# Altium PCB Shield_MCXC444 - PCB.PcbDoc (part 2 of 3)
Units mm, origin at the board's own origin, x right, y up, seen from the top; angles counter-clockwise.
Board outline 100 x 55 mm, 2 copper layers (Top Layer, Bottom Layer); 120 components, 83 nets, 361 pads, 693 vias.
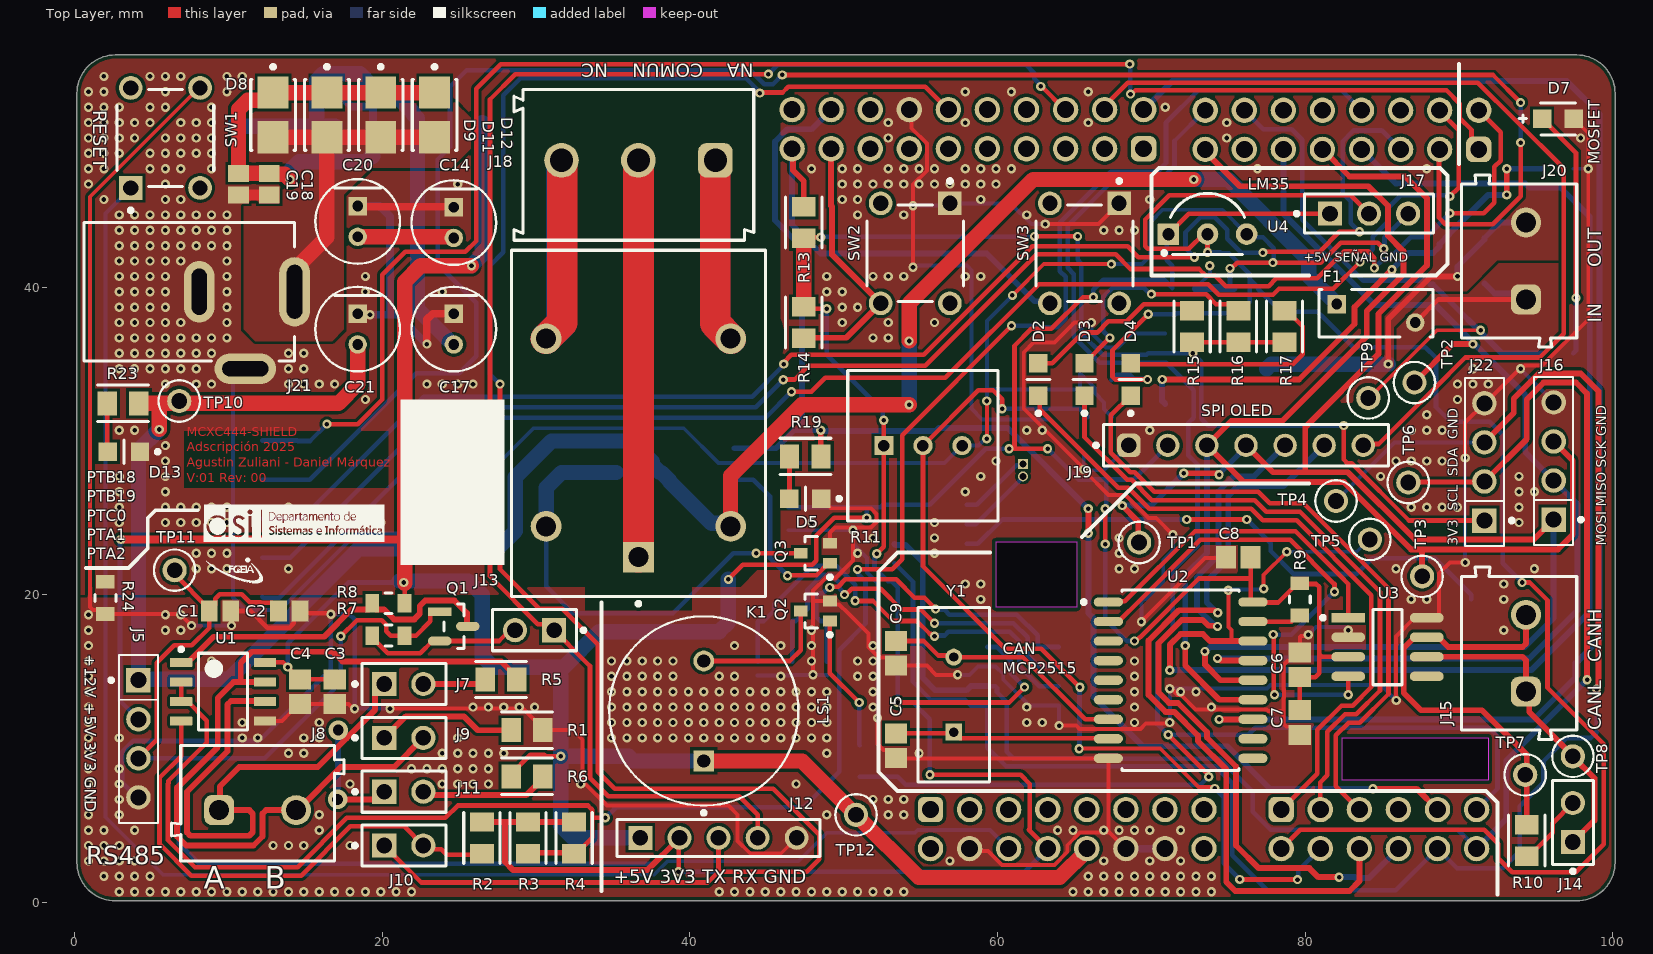
[diagram p0: Top Layer view]

## Via types
v1: diameter 0.6, hole 0.3, Top Layer to Bottom Layer, tented both sides, 543 vias
v2: diameter 0.6, hole 0.3, Top Layer to Bottom Layer, 148 vias
v3: diameter 1.27, hole 0.711, Top Layer to Bottom Layer, 2 vias

## Nets (pads, with @x,y where several pads share a name; then routed paths per layer and width w, separated by ;. In a path a pad name is that pad's centre, name@x,y a point inside that pad or via, vN(x,y) a via of type N, cw(c..) or ccw(c..) an arc to the next point about the centre after c; other vN are vias at no path point) (continued)
+3.3V: (continued)
  Top Layer w0.3: J5.3@4.15,9.37 5.349,10.569 5.349,15.595 6.474,16.721 7.625,16.721 8.75,17.846 C1.1@8.75,18.95 ; TP11.1@6.5,21.6 6.5,21.325 8.75,19.075 C1.1@8.75,18.95 ; C2.1@13.25,18.95 13.25,19.075 12.85,19.475 12.136,19.475 12.107,19.504 11.392,19.504 10.867,20.029 9.433,20.029 9.15,19.746 9.15,19.35 C1.1@8.75,18.95 ; v2(17.3,17.3) 18.354,18.354 19.967,18.354 20.259,18.063 20.259,17.641 20.55,17.35 R7.2@21.45,17.35 22.19,17.35 23.128,18.288 23.128,18.761 23.267,18.9 Q1.1@23.74,18.9 ; v2(39.25,2) 39.285,2.035 39.285,4.165 J12.2@39.32,4.2 ; R14.2@47.4,38.725 47.525,38.6 v2(48.9,38.6) ; R13.2@47.4,43.175 47.475,43.25 v2(48.5,43.25) ; v2(52.146,22.666) 52.61,23.13 R11.1@52.61,29.7 52.6,29.71 v2(52.6,31.35) ; v2(53.5,13) 60.75,13 v2(61.75,14) ; v2(55.6,8.3) 61.5,8.3 62.1,7.7 62.1,4.798 62.031,4.729 J3.8@63.26,3.5 ; v2(62.4,43.3) v2(65.2,43.3) ; v2(72.7,35.7) 72.7,36.375 R15.2@72.65,36.425 R16.2@75.65,36.425 R17.2@78.65,36.425 ; v2(82.5,31) 82.5,28.8 82.741,28.559 83.019,28.559 86.748,24.83 J22.1@91.65,24.83
  Top Layer w0.381: R2.2@26.472,5.225 27.972,5.225 ; R4.2@32.472,5.225 R3.2@29.472,5.225 27.972,5.225 ; J12.2@39.285,4.165 37.222,2.102 28.51,2.102 27.972,2.64 27.972,5.225
  Top Layer w1: R14.2@47.4,38.725 R13.2@47.4,43.175
  Bottom Layer w0.3: J5.3@4.15,9.37 6.76,9.37 ; v2(17.3,17.3) 17.3,14.3 12.37,9.37 6.76,9.37 ; v2(39.25,2) 61.76,2 J3.8@63.26,3.5 ; J12.2@39.32,4.2 37.631,2.511 8.089,2.511 6.76,3.84 6.76,9.37 ; v2(48.5,43.25) 48.525,43.275 62.375,43.275 v2(62.4,43.3) ; v2(48.9,38.6) 48.9,35.6 52.543,31.957 52.543,31.407 v2(52.6,31.35) ; v2(52.146,22.666) 52.146,22.585 52,22.439 52,21.776 52.876,20.9 53.1,20.9 53.5,20.5 v2(53.5,13) 54.5,13 55.6,11.9 v2(55.6,8.3) ; U7.8@59.332,16.605 59.95,16.605 60.846,15.709 60.846,14.904 v2(61.75,14) ; v2(65.2,43.3) 65.2,41.775 65.45,41.525 65.45,36.989 66.843,35.596 69.679,35.596 69.783,35.7 v2(72.7,35.7) 73.247,35.153 73.247,31.452 73.7,31 v2(82.5,31)
+5V: C3.2 C4.2 C6.2 C7.2 C8.2 C12.2 C22.1 C23.1 D10.2 J3.10 J5.2 J12.1 J17.1 J19.2 LS1.1 R6.1 R8.2 R9.2 TP12.1 U1.8 U2.18 U3.3 U4.1 U6.8 | length 284.2
  Top Layer w0.3: U1.8@12.375,15.605 13.545,15.605 v2(13.848,15.302) 14.075,15.075 14.075,15 14.575,14.5 C4.2@14.65,14.5 C3.2@16.9,14.5 ; 21.375,23.6 21.45,23.525 ; v2(21.4,20.8) 21.45,20.75 R8.2@21.45,19.45 ; R6.1@28.375,8.2 28.375,8.35 29.624,9.6 30.521,9.6 30.621,9.5 v2(31.6,9.5) ; v2(42.5,21) 43.446,21.946 47.946,21.946 48.214,22.214 48.214,23.836 49.379,25 v2(51.5,25) ; v2(60.75,29.5) 61.1,29.5 ; v2(63.25,29.5) 61.1,29.5 ; v2(66.23,39.356) 65.556,39.356 63.5,37.3 62.2,37.3 61.1,36.2 61.1,29.5 ; v2(67,23.3) v2(67,25.6) ; v2(68.9,17) 68.981,17 69.231,17.25 69.269,17.25 73.079,21.059 76.45,21.059 ; U4.1@71.11,43.45 72.44,44.78 J17.1@81.61,44.78 ; C8.2@76.45,22.45 76.45,21.059 ; C7.2@79.65,12.5 C6.2@79.65,14.65 80.65,14.65 80.9,14.9 80.9,16.146 ; U3.3@82.798,15.97 81.076,15.97 80.9,16.146 ; 76.45,21.059 76.45,19.669 76.589,19.53 U2.18@76.6,19.53 76.63,19.5 78.25,19.5 79.5,20.75 R9.2@79.65,20.75 79.7,20.7 80.724,20.7 80.9,20.524 80.9,16.146
  Top Layer w0.5: v2(3,23.6) 21.375,23.6
  Top Layer w1: v2@21.45,20.75 21.45,23.525 21.45,40.35 22.5,41.4 v2(25.8,41.4) ; LS1.1@40.9,9.2 47.3,9.2 TP12.1@50.8,5.7 54.879,1.621 64.038,1.621 65.8,3.383 J3.10@65.8,3.5
  Bottom Layer w0.3: v2(3,23.6) 2.951,23.551 2.951,13.109 J5.2@4.15,11.91 ; v2(13.848,15.302) 13.848,16.848 17.3,20.3 17.8,20.8 v2(21.4,20.8) ; C23.1@46.4,25.7 C22.1@49.4,25.7 51.5,25.7 ; v2(51.5,25) 51.5,25.7 ; v2(60.75,29.5) 59.242,29.5 55.597,25.855 U6.8@53.3,25.855 52.569,25.855 52.414,25.7 51.5,25.7 ; v2(63.25,29.5) 65.25,27.5 67.053,27.5 ; v2(66.23,39.356) 66.23,39.83 66.87,40.47 70.85,40.47 71.35,39.97 C12.2@71.35,39.95 ; v2(67,23.3) 67,18.4 68.4,17 v2(68.9,17) ; v2(67,25.6) 67.053,25.653 67.053,27.5 ; J19.2@71.07,29.715 69.918,28.563 68.855,27.5 67.053,27.5 ; U4.1@71.11,43.45 71,43.34 71,41.75 71.35,41.4 C12.2@71.35,40.025
  Bottom Layer w1: 21.1,20.9 25.6,20.9 26.5,20 26.5,16 27.2,15.3 31.014,15.3 ; v2(25.8,41.4) 26.51,42.11 D10.2@26.51,50.7 ; J12.1@36.78,4.2 32.4,4.2 31.6,5 v2(31.6,9.5) ; LS1.1@40.9,9.2 36.313,9.2 36.012,9.5 v2(31.6,9.5) ; v2(42.5,21) 42.5,18.2 41.9,17.6 34.1,17.6 31.8,15.3 31.014,15.3 ; 31.014,15.3 31.6,14.714 v2(31.6,9.5)
+9V: J3.16
+12V: C14.2 C15.1 C18.1 C19.1 C20.2 C21.2 D1.1 D8.1 D9.1 D11.1 D12.1 F1.1 J5.1 K1.2 R23.2 TP10.1 U5.3 | length 178
  Top Layer w0.3: R23.2@4.175,32.45 R23.2@4.653,31.972
  Top Layer w1: R23.2@4.175,32.45 5.5,32.45 ; v2(5.5,30.75) 5.5,32.45 ; v2(14,47) 13.65,47.35 12.7,47.35 C18.1@12.65,47.4 C19.1@10.65,47.4 10.65,51.557 11.236,52.143 12.4,52.143 12.9,52.643 D8.1@12.9,52.65 D9.1@16.4,52.65 D11.1@19.9,52.65 D12.1@23.4,52.65 ; C21.2@18.4,36.275 18.4,33.7 17.15,32.45 5.5,32.45 ; C20.2@18.4,43.275 24.521,43.275 24.596,43.2 C14.2@24.65,43.2 ; K1.2@42.65,24.45 42.639,24.461 42.639,27.739 47.25,32.35 v2(54.25,32.35) ; v2(54.25,36.504) 54.25,38.936 62.314,47 v2(72.75,47)
  Bottom Layer w1: v2(5.5,30.75) 4.15,29.4 J5.1@4.15,14.45 4.2,14.5 10,14.5 18.5,23 27.5,23 28.65,24.15 28.65,27.65 31,30 36.2,30 37.55,28.65 37.55,28.45 38.05,27.95 38.15,27.95 38.65,27.45 38.65,27.4 41.409,24.641 42.459,24.641 K1.2@42.65,24.45 ; v2(14,47) 14,47.574 14.586,48.16 U5.3@16.945,48.16 18.935,48.16 19.275,48.5 C15.1@19.4,48.5 ; v2(54.25,32.35) v2(54.25,36.504) ; v2(72.75,47) 75,47 80.225,41.775 80.225,40.725 F1.1@82.05,38.9
\CAN_CS: J1.7 TP5.1 U2.16 | length 93.4
  Top Layer w0.254: v2(75,20.3) 75,17.9 75.2,17.7 75.2,16.995 75.205,16.99 ; v2(77.3,20.4) 77.3,21.3 v2(78.802,22.802) ; TP5.1@83.994,23.6 TP5.1@84.2,23.6
  Top Layer w0.381: v2(71.2,15.1) 71.2,16.753 71.892,17.444 73.356,17.444 73.81,16.99 75.205,16.99 U2.16@76.6,16.99
  Bottom Layer w0.254: v2(75,20.3) 75.05,20.35 77.25,20.35 v2(77.3,20.4) ; v2(78.802,22.802) 83.349,22.802 84.147,23.6 TP5.1@84.2,23.6
  Bottom Layer w0.381: v2(71.2,15.1) 71.22,15.12 94.718,15.12 98.498,18.9 98.498,44.579 96.599,46.477 94.563,46.477 94.305,46.735 85.885,46.735 J1.7@83.66,48.96
\INT: J2.2 U2.12 | length 95.1
  Top Layer w0.381: v2(74.4,11.9) 74.405,11.905 76.595,11.905 U2.12@76.6,11.91
  Bottom Layer w0.381: J2.2@69.5,51.54 71.355,53.395 97.006,53.395 99.133,51.267 99.133,17.111 97.578,15.557 97.578,14.635 94.843,11.9 v2(74.4,11.9)
\RE: J1.8 R3.1 R4.1 U1.2 U1.3 | length 136.9
  Top Layer w0.3: U1.2@6.925,14.335 U1.3@6.925,13.065 7.35,13.065 8.6,11.815 8.6,10.4 6.1,7.9 6.1,7.739 6.071,7.709 6.071,4.049 7.823,2.296 14.496,2.296 17.7,5.5 24.1,5.5 24.9,6.3 33.374,6.3 33.654,6.02 33.654,5.5 ; R4.1@32.472,3.175 32.622,3.175 33.654,4.206 33.654,5.5 ; v2(34.5,5.5) 33.654,5.5 ; v2(50.896,21.65) 53.15,21.65 53.8,22.3 53.8,30.385 v2(60.907,37.493)
  Top Layer w0.381: R3.1@29.472,3.175 29.527,3.23 32.417,3.23 R4.1@32.472,3.175
  Bottom Layer w0.3: v2(34.5,5.5) 35.2,6.2 47.4,6.2 49.7,8.5 49.7,16.4 51.411,18.111 51.411,20.892 50.953,21.349 50.953,21.593 v2(50.896,21.65) ; v2(60.907,37.493) 62.498,37.493 62.591,37.4 63.874,37.4 64.42,37.946 64.42,40.676 64.05,41.046 64.05,44.201 67.349,47.5 70.4,47.5 70.946,48.046 70.946,50.684 73.062,52.8 82.36,52.8 J1.8@83.66,51.5